# EAGLE board anchor (EAGLE 6.5.0)
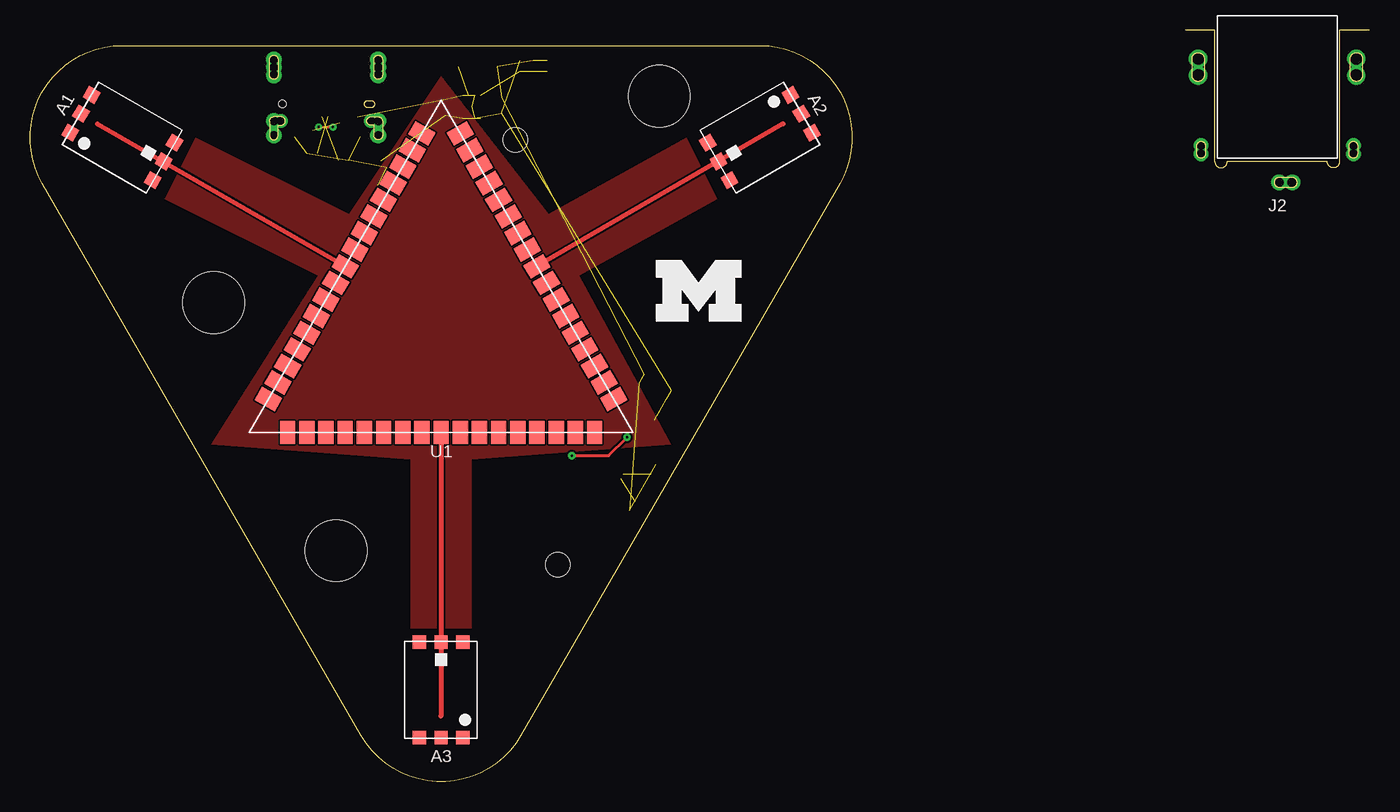
[diagram p0: board, top side]
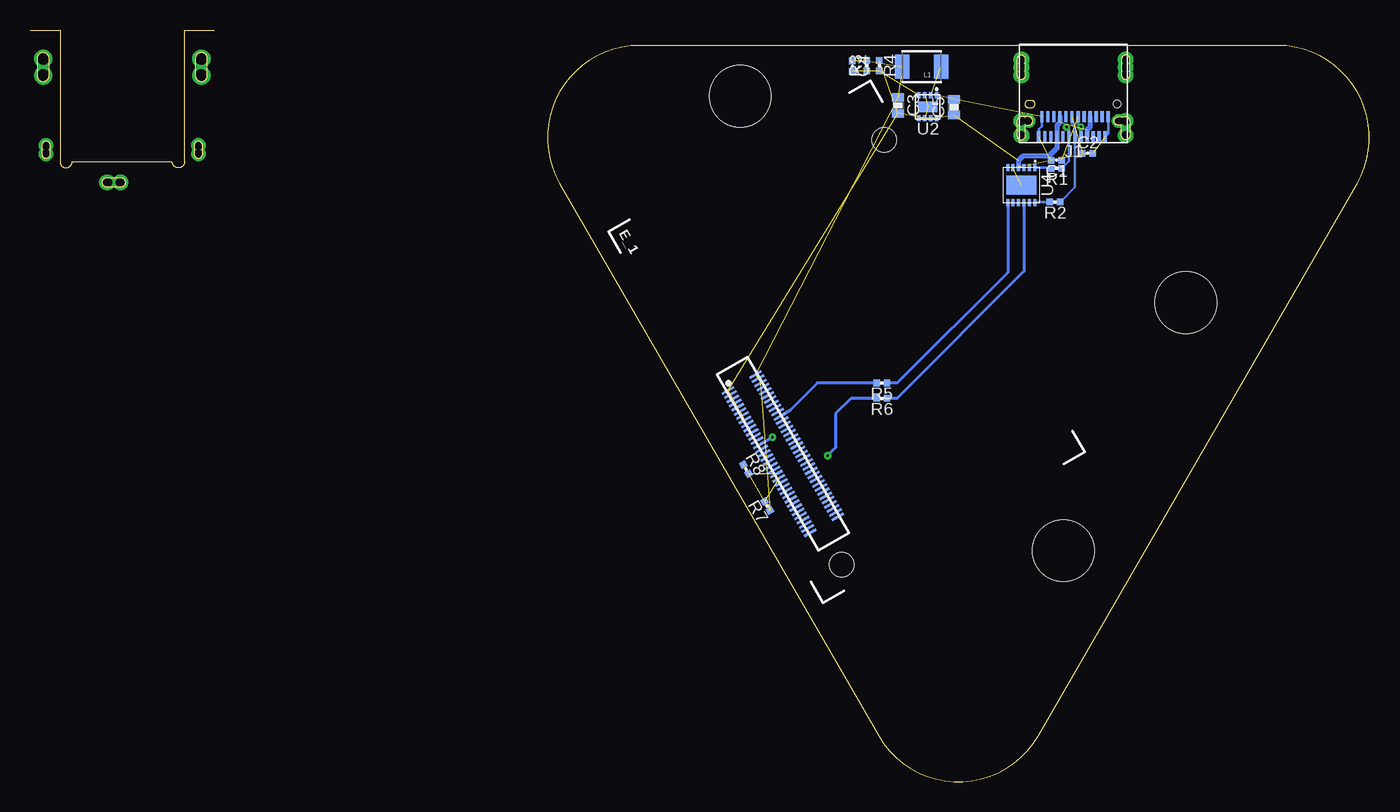
[diagram p1: board, bottom side, seen from below]

Size 110.85 x 62.22 mm. Coordinates in mm from the lower left corner, seen from the top.
Outline: 29.69,60.95 60.41,60.95 arc-120 67.01,49.52 40.61,3.8 arc-120 27.41,3.8 1.01,49.52 arc-120 7.61,60.95 19.28,60.95
Copper layers (1*16): Top 0.0178mm / dielectric 59mil / Bottom 0.0178mm
Design rules "sunstone-2lyr_v1.0.0.3": minimum track width 6mil, minimum drill 14mil, track to track 6mil, track to pad 6mil, pad to pad 6mil, via to via 6mil, smd to smd 6mil, copper to edge 20mil, drill to drill 16mil, minimum pad ring 8mil, minimum via ring 8mil, stop-mask expansion 3mil, vias tented up to drill 50mil, thermal gap 10mil
Holes 5.08 mm at 25.32,19.12 15.19,39.67 52.07,56.76

## Footprints (pad centres in the part's own frame; a part is rotated, then mirrored left to right if it is on the bottom)
TAIYO-YUDEN-AH086M = smd 1.1 x 1.1: A 0,-3.95; NC0 -1.8,3.95; NC1 0,3.95; NC2 1.8,3.95; NC3 1.8,-3.95; NC4 -1.8,-3.95
0402_CAP = smd 0.536 x 0.546: 1 -0.433,0; 2 0.433,0
0603_CAP = smd 0.7 x 1: 1 -0.65,0; 2 0.65,0
EDISON_DAUGHTER = smd 1.14 x 0.2: 1 1.98,19.17; 2 4.62,19.17; 3 1.98,18.77; 4 4.62,18.77; 5 1.98,18.37; 6 4.62,18.37; 7 1.98,17.97; 8 4.62,17.97; 9 1.98,17.57; 10 4.62,17.57; 11 1.98,17.17; 12 4.62,17.17; 13 1.98,16.77; 14 4.62,16.77; 15 1.98,16.37; 16 4.62,16.37; 17 1.98,15.97; 18 4.62,15.97; 19 1.98,15.57; 20 4.62,15.57; 21 1.98,15.17; 22 4.62,15.17; 23 1.98,14.77; 24 4.62,14.77; 25 1.98,14.37; 26 4.62,14.37; 27 1.98,13.97; 28 4.62,13.97; 29 1.98,13.57; 30 4.62,13.57; 31 1.98,13.17; 32 4.62,13.17; 33 1.98,12.77; 34 4.62,12.77; 35 1.98,12.37; 36 4.62,12.37; 37 1.98,11.97; 38 4.62,11.97; 39 1.98,11.57; 40 4.62,11.57; 41 1.98,11.17; 42 4.62,11.17; 43 1.98,10.77; 44 4.62,10.77; 45 1.98,10.37; 46 4.62,10.37; 47 1.98,9.97; 48 4.62,9.97; 49 1.98,9.57; 50 4.62,9.57; 51 1.98,9.17; 52 4.62,9.17; 53 1.98,8.77; 54 4.62,8.77; 55 1.98,8.37; 56 4.62,8.37; 57 1.98,7.97; 58 4.62,7.97; 59 1.98,7.57; 60 4.62,7.57; 61 1.98,7.17; 62 4.62,7.17; 63 1.98,6.77; 64 4.62,6.77; 65 1.98,6.37; 66 4.62,6.37; 67 1.98,5.97; 68 4.62,5.97; 69 1.98,5.57; 70 4.62,5.57 | hole 2: 23.53,30.67; 2.93,1.98
DX07S024JJ2 = smd 0.27 x 0.9: A1 -2.625,7.55; A2 -2.125,7.55; A3 -1.625,7.55; A4 -1.125,7.55; A5 -0.625,7.55; A6 -0.125,7.55; A7 0.375,7.55; A8 0.875,7.55; A9 1.375,7.55; A10 1.875,7.55; A11 2.375,7.55; A12 2.875,7.55; B1 2.625,5.9; B2 2.125,5.9; B3 1.625,5.9; B4 1.125,5.9; B5 0.625,5.9; B6 0.125,5.9; B7 -0.375,5.9; B8 -0.875,5.9; B9 -1.375,5.9; B10 -1.875,5.9; B11 -2.375,5.9; B12 -2.875,5.9 | drill 0.7 pad 1.3: P$1 -4.32,1.8; P$2 -4.32,2.45; P$3 -4.32,1.15; P$4 4.32,1.8; P$5 4.32,2.45; P$6 4.32,1.15; P$7 -4.32,6.25; P$9 -4.32,7.45; P$10 4.32,6.25; P$12 4.32,7.45 | drill 0.7 pad 1: P$8 -3.72,6.25; P$11 3.72,6.25 | hole 0.6: -3.6,4.85
PJ-069B-SMT-TR = drill 0.8 pad 1.3: 1A 12.6,1.25; 1B 12.6,0.15 | drill 0.7 pad 1.2: 2A 9.55,-6.3; 2B 10.25,-6.3; 3A 9.55,6.3; 3B 10.25,6.3 | drill 1 pad 1.5: MOUNT1 2.35,6.55; MOUNT2 3.75,6.55; MOUNT3 2.35,-6.55; MOUNT4 3.75,-6.55
1210 = smd 1.2 x 2: 1 -1.6,0; 2 1.6,0
0402_RES = smd 0.536 x 0.546: 1 -0.433,0; 2 0.433,0
TRIPOINT = smd 1.27 x 1.905: P$1 0,9.171; P$2 1.587,9.171; P$3 3.175,9.171; P$4 4.763,9.171; P$5 6.35,9.171; P$6 7.938,9.171; P$7 9.525,9.171; P$8 11.113,9.171; P$9 12.7,9.171; P$10 -1.587,9.171; P$11 -3.175,9.171; P$12 -4.763,9.171; P$13 -6.35,9.171; P$14 -7.938,9.171; P$15 -9.525,9.171; P$16 -11.113,9.171; P$17 -12.7,9.171 | smd 1.27 x 1.905 rotated 60: P$18 7.938,-4.583; P$19 8.731,-3.208; P$20 9.525,-1.833; P$21 10.319,-0.458; P$22 11.113,0.917; P$23 11.906,2.292; P$24 12.7,3.667; P$25 13.494,5.042; P$26 14.287,6.417; P$27 7.144,-5.958; P$28 6.35,-7.332; P$29 5.556,-8.707; P$30 4.763,-10.082; P$31 3.969,-11.457; P$32 3.175,-12.832; P$33 2.381,-14.207; P$34 1.587,-15.582 | smd 1.27 x 1.905 rotated 120: P$35 -7.938,-4.583; P$36 -8.731,-3.208; P$37 -9.525,-1.833; P$38 -10.319,-0.458; P$39 -11.113,0.917; P$40 -11.906,2.292; P$41 -12.7,3.667; P$42 -13.494,5.042; P$43 -14.287,6.417; P$44 -7.144,-5.958; P$45 -6.35,-7.332; P$46 -5.556,-8.707; P$47 -4.763,-10.082; P$48 -3.969,-11.457; P$49 -3.175,-12.832; P$50 -2.381,-14.207; P$51 -1.587,-15.582
S-PWSON-N8 = smd 0.28 x 0.5: 1 -0.75,-0.95; 2 -0.25,-0.95; 3 0.25,-0.95; 4 0.75,-0.95; 5 0.75,0.95; 6 0.25,0.95; 7 -0.25,0.95; 8 -0.75,0.95 | smd 1.6 x 0.9: P$1 0,0
DFN-12/3MM = smd 0.6 x 0.25: 1 -1.45,1.13; 2 -1.45,0.68; 3 -1.45,0.23; 4 -1.45,-0.23; 5 -1.45,-0.68; 6 -1.45,-1.13; 7 1.45,-1.13; 8 1.45,-0.68; 9 1.45,-0.23; 10 1.45,0.23; 11 1.45,0.68; 12 1.45,1.13 | smd 1.6 x 2.5: 13 0,0

## Placement (x,y rotation side)
A1  TAIYO-YUDEN-AH086M  [TAIYO-YUDEN-AH086M]  7.62,53.33 60 top
A2  TAIYO-YUDEN-AH086M  [TAIYO-YUDEN-AH086M]  60.4,53.33 300 top
A3  TAIYO-YUDEN-AH086M  [TAIYO-YUDEN-AH086M]  34.01,7.61 180 top
C1  47pF  [0402_CAP]  25.91,51.45 180 bottom
C2  47pF  [0402_CAP]  23.32,52.04 0 bottom
C3  10uF  [0603_CAP]  39.01,56 270 bottom
C4  10pF  [0402_CAP]  42.8,59.25 270 bottom
C5  10uF  [0603_CAP]  34.39,55.85 90 bottom
E_1  EDISON_CONNECTOR_SEGMENTED  [EDISON_DAUGHTER]  45.21,14.8 30 bottom
J1  USB_C_JAE_DX07S024JJ2  [DX07S024JJ2]  24.49,60.95 180 bottom
J2  CUI_PJ-069B-SMT-TR  [PJ-069B-SMT-TR]  103.23,62.22 270 top
L1  1uH  [1210]  37.06,59.2 180 bottom
LOGO1  UMICH_SOLID_MEDIUM  [UMICH_SOLID_200MIL]  51.79,38.09 0 top
R1  27  [0402_RES]  25.88,50.79 180 bottom
R2  27  [0402_RES]  26.01,48 180 bottom
R3  680k  [0402_RES]  41.61,59.28 90 bottom
R4  120k  [0402_RES]  40.56,59.28 270 bottom
R5  100  [0402_RES]  40.36,33.01 180 bottom
R6  100  [0402_RES]  40.36,31.74 180 bottom
R7  10k  [0402_RES]  49.84,22.83 120 bottom
R8  10k  [0402_RES]  51.59,25.87 300 bottom
U1  TRIPOINT  [TRIPOINT]  34.01,38.09 180 top
U2  TPS62065  [S-PWSON-N8]  36.55,55.87 180 bottom
U4  FTDI234XD  [DFN-12/3MM]  28.8,49.39 270 bottom

## Library data of the parts
A1-A3 = chips; DIGIKEY: 587-2204-1-ND
C1 C2 C4 R1-R8 = passives
C3 C5 = passives; DIGIKEY: 490-6405-1-ND
E_1 = Edison
J1 = connector; MOUSER: 656-DX07S024JJ2R1300
J2 = connector; DIGIKEY: CP-069BPJCT-ND
L1 = SparkFun-Passives; DIGIKEY: 490-10767-1-ND
LOGO1 = logos
U1 = tripoint
U2 = chips; DIGIKEY: 296-39441-1-ND
U4 = chips; DIGIKEY: 768-1178-1-ND; MOUSER: 895-FT234XD-R; NEWARK: 53X3171

## Nets
D+: C2.1 J1.A6 J1.B6 R2.1
D-: C1.1 J1.A7 J1.B7 R1.1
EDISON_UART_RX: E_1.22 R5.2
EDISON_UART_TX: E_1.27 R6.2
GND: C1.2 C2.2 C3.2 C5.2 E_1.1 E_1.5 E_1.9 E_1.11 E_1.13 E_1.15 J1.A1 J1.A12 J1.B1 J1.B12 R4.1 U2.1 U2.3 U2.6 U2.P$1 U4.5 U4.13
N$1: L1.1 U2.2
N$2: R5.1 U4.7
N$6: R1.2 U4.1
N$7: R2.2 U4.12
N$8: C4.2 R3.1 R4.2 U2.4
N$9: R6.1 U4.10
SCL: E_1.41 R8.2
SDA: E_1.43 R7.2
VBUS: C5.1 J1.A4 J1.A9 J1.B4 J1.B9 U2.5 U2.7 U2.8 U4.4
VCC: C3.1 C4.1 E_1.2 E_1.4 E_1.6 L1.2 R3.2 R7.1 R8.1

## Tracks (layer width: path | path; a pad name or v marks a point on that pad's centre or on a via)
D+  (1 unrouted)
  Bottom 0.203: R2.1 24.36,49.21 J1.A6 24.36,54.22 24.61,54.47 J1.B6
D-  (via drill 0.2)  (1 unrouted)
  Top 0.203: v25.07,54.2 v23.88,54.2
  Bottom 0.203: R1.1 24.86,51.38 J1.A7 24.86,53.99 v25.07,54.2 | v23.88,54.2 24.11,54.43 J1.B7
EDISON_UART_RX
  Bottom 0.254: R5.2 45.7,33.01 47.96,30.75 E_1.22
EDISON_UART_TX  (via drill 0.2)
  Top 0.254: v44.83,26.99 47.88,26.99 v49.4,28.52
  Bottom 0.254: R6.2 42.9,31.74 44.17,30.47 44.17,27.65 v44.83,26.99 | v49.4,28.52 E_1.27
GND  (18 unrouted)
  Bottom 0.203: J1.B12 21.61,53.65 J1.A1 | J1.B1 27.11,54.26 27.36,54.01 J1.A12
  pour Top: 34.01,58.41 26.39,46.98 13.69,53.33 11.15,48.25 23.85,41.9 14.96,27.93 31.47,26.66 31.47,12.69 36.55,12.69 36.55,26.66 53.06,27.93 45.44,41.9 56.87,48.25 54.33,53.33 42.9,46.98
N$1  (1 unrouted)
N$2
  Bottom 0.254: U4.7 29.93,42.17 39.09,33.01 R5.1
N$3
  Top 0.406: 5.56,54.47 26.14,42.66
N$4
  Top 0.406: 62.33,54.47 41.89,42.66
N$5
  Top 0.406: 34.01,28.95 34.01,5.45
N$6
  Bottom 0.203: U4.1 26.32,50.84 R1.2
N$7
  Bottom 0.203: R2.2 27.62,48 U4.12
N$8  (3 unrouted)
N$9
  Bottom 0.254: U4.10 28.57,42.26 39.09,31.74 R6.1
SCL  (1 unrouted)
SDA  (1 unrouted)
VBUS  (5 unrouted)
  Bottom 0.406: J1.B4 25.61,54.57 25.86,54.32 J1.A9 25.86,52.44 26.52,51.78 28.68,51.78 29.03,51.43 U4.4 | J1.B9 23.11,54.2 23.36,53.95 J1.A4
VCC  (8 unrouted)